# Altium PCB eq.PcbDoc
Units mil, origin at the board's own origin, x right, y up, seen from the top; angles counter-clockwise.
Board outline 7000 x 16300 mil, 2 copper layers (Top Layer, Bottom Layer); 218 components, 155 nets, 606 pads, 0 vias.
Unrouted connection lines stored in the file: 387.
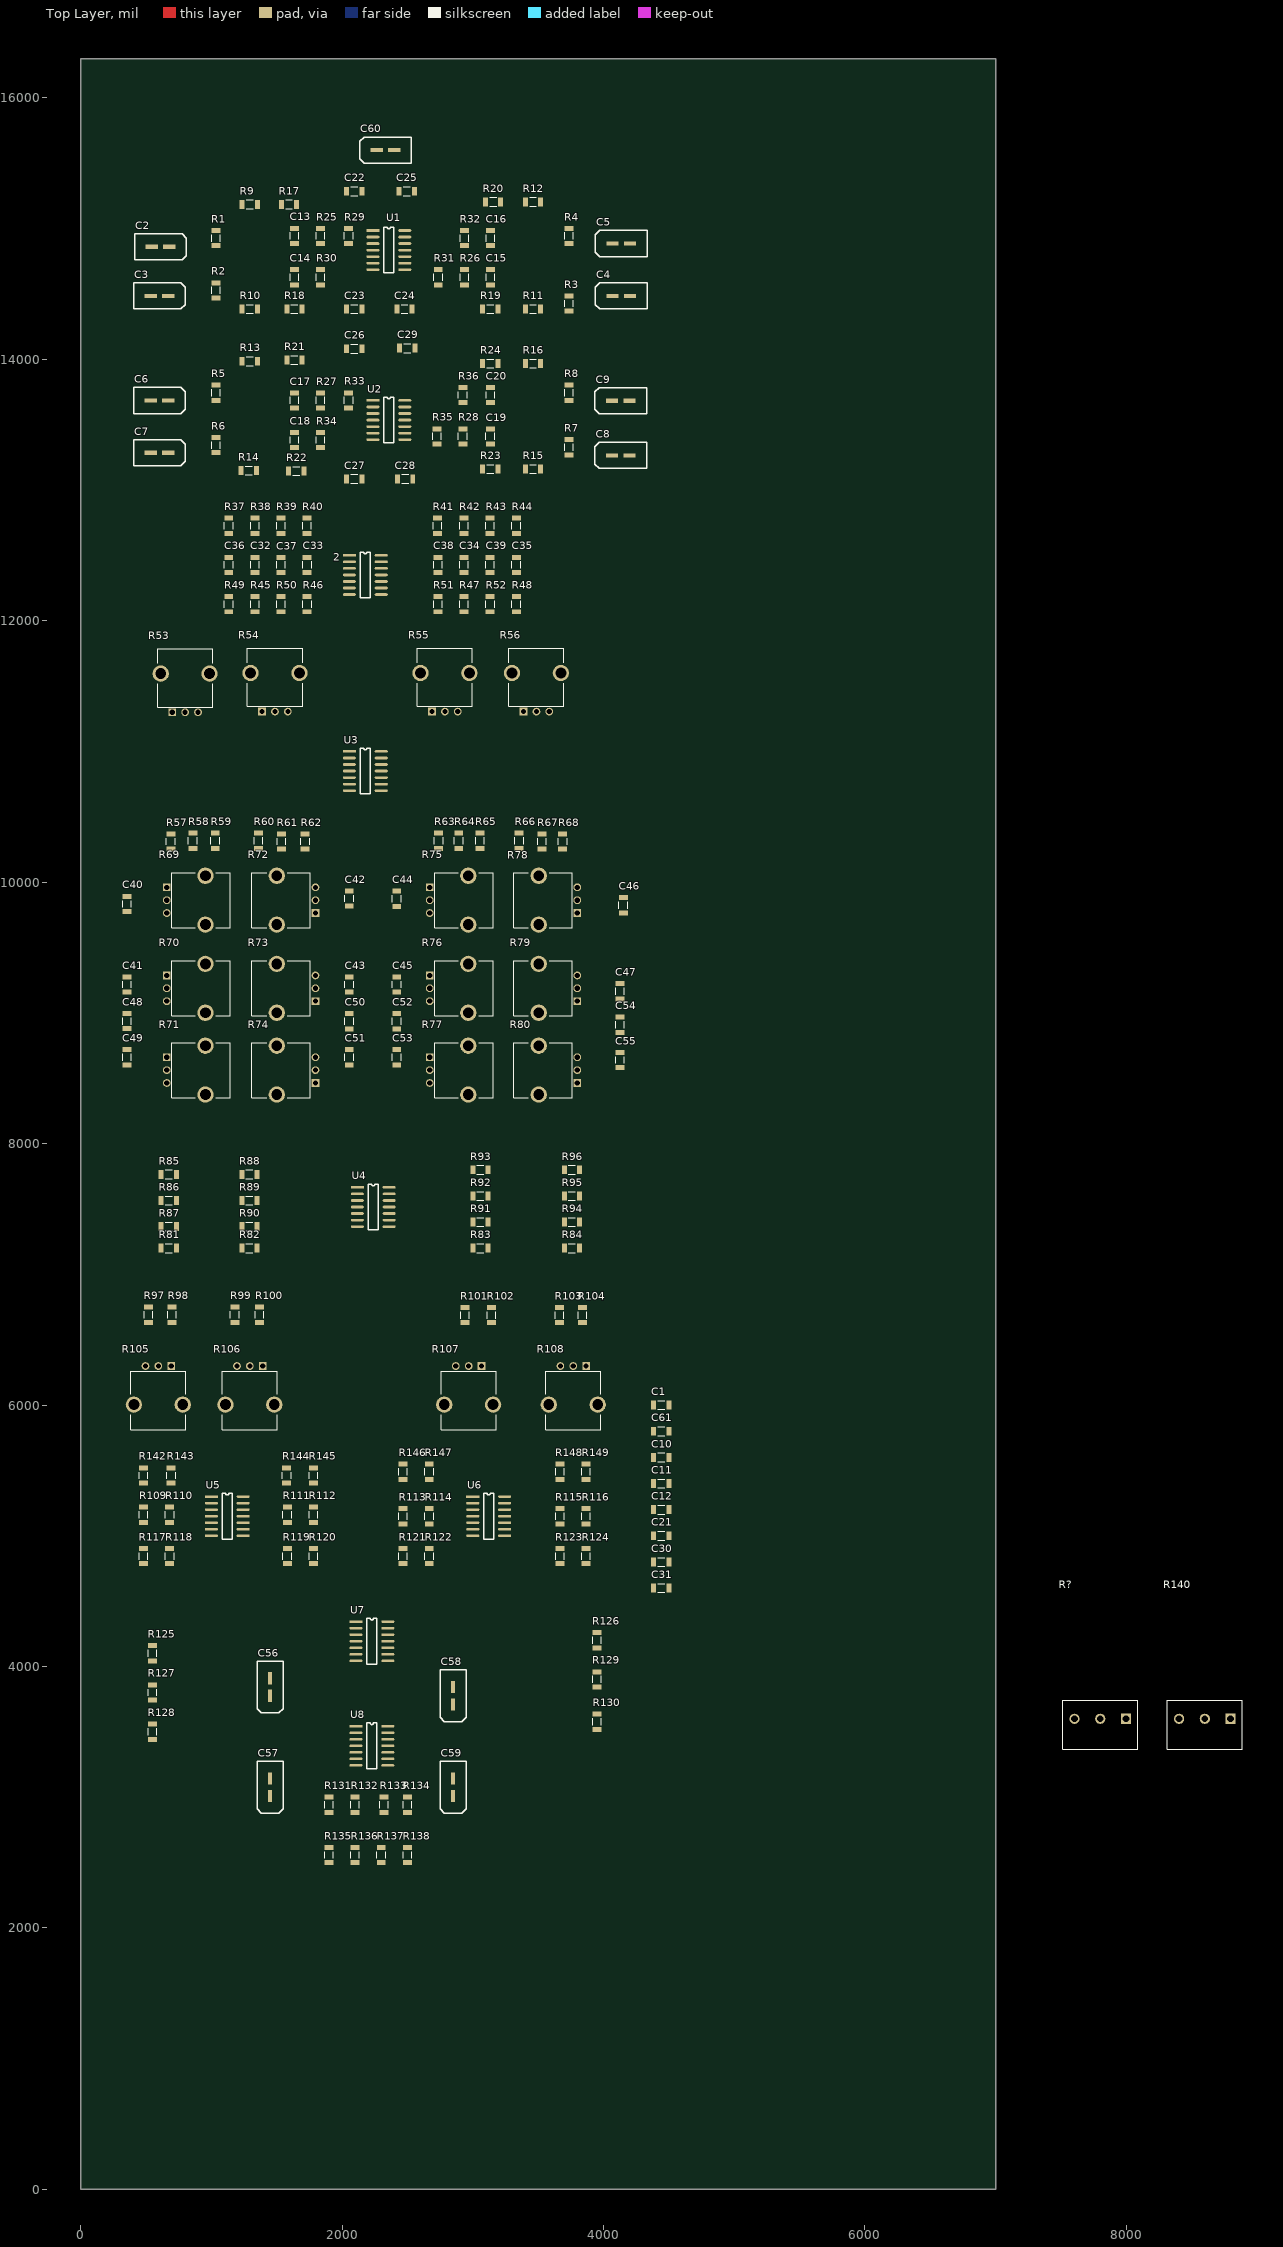
[diagram p0: Top Layer view]
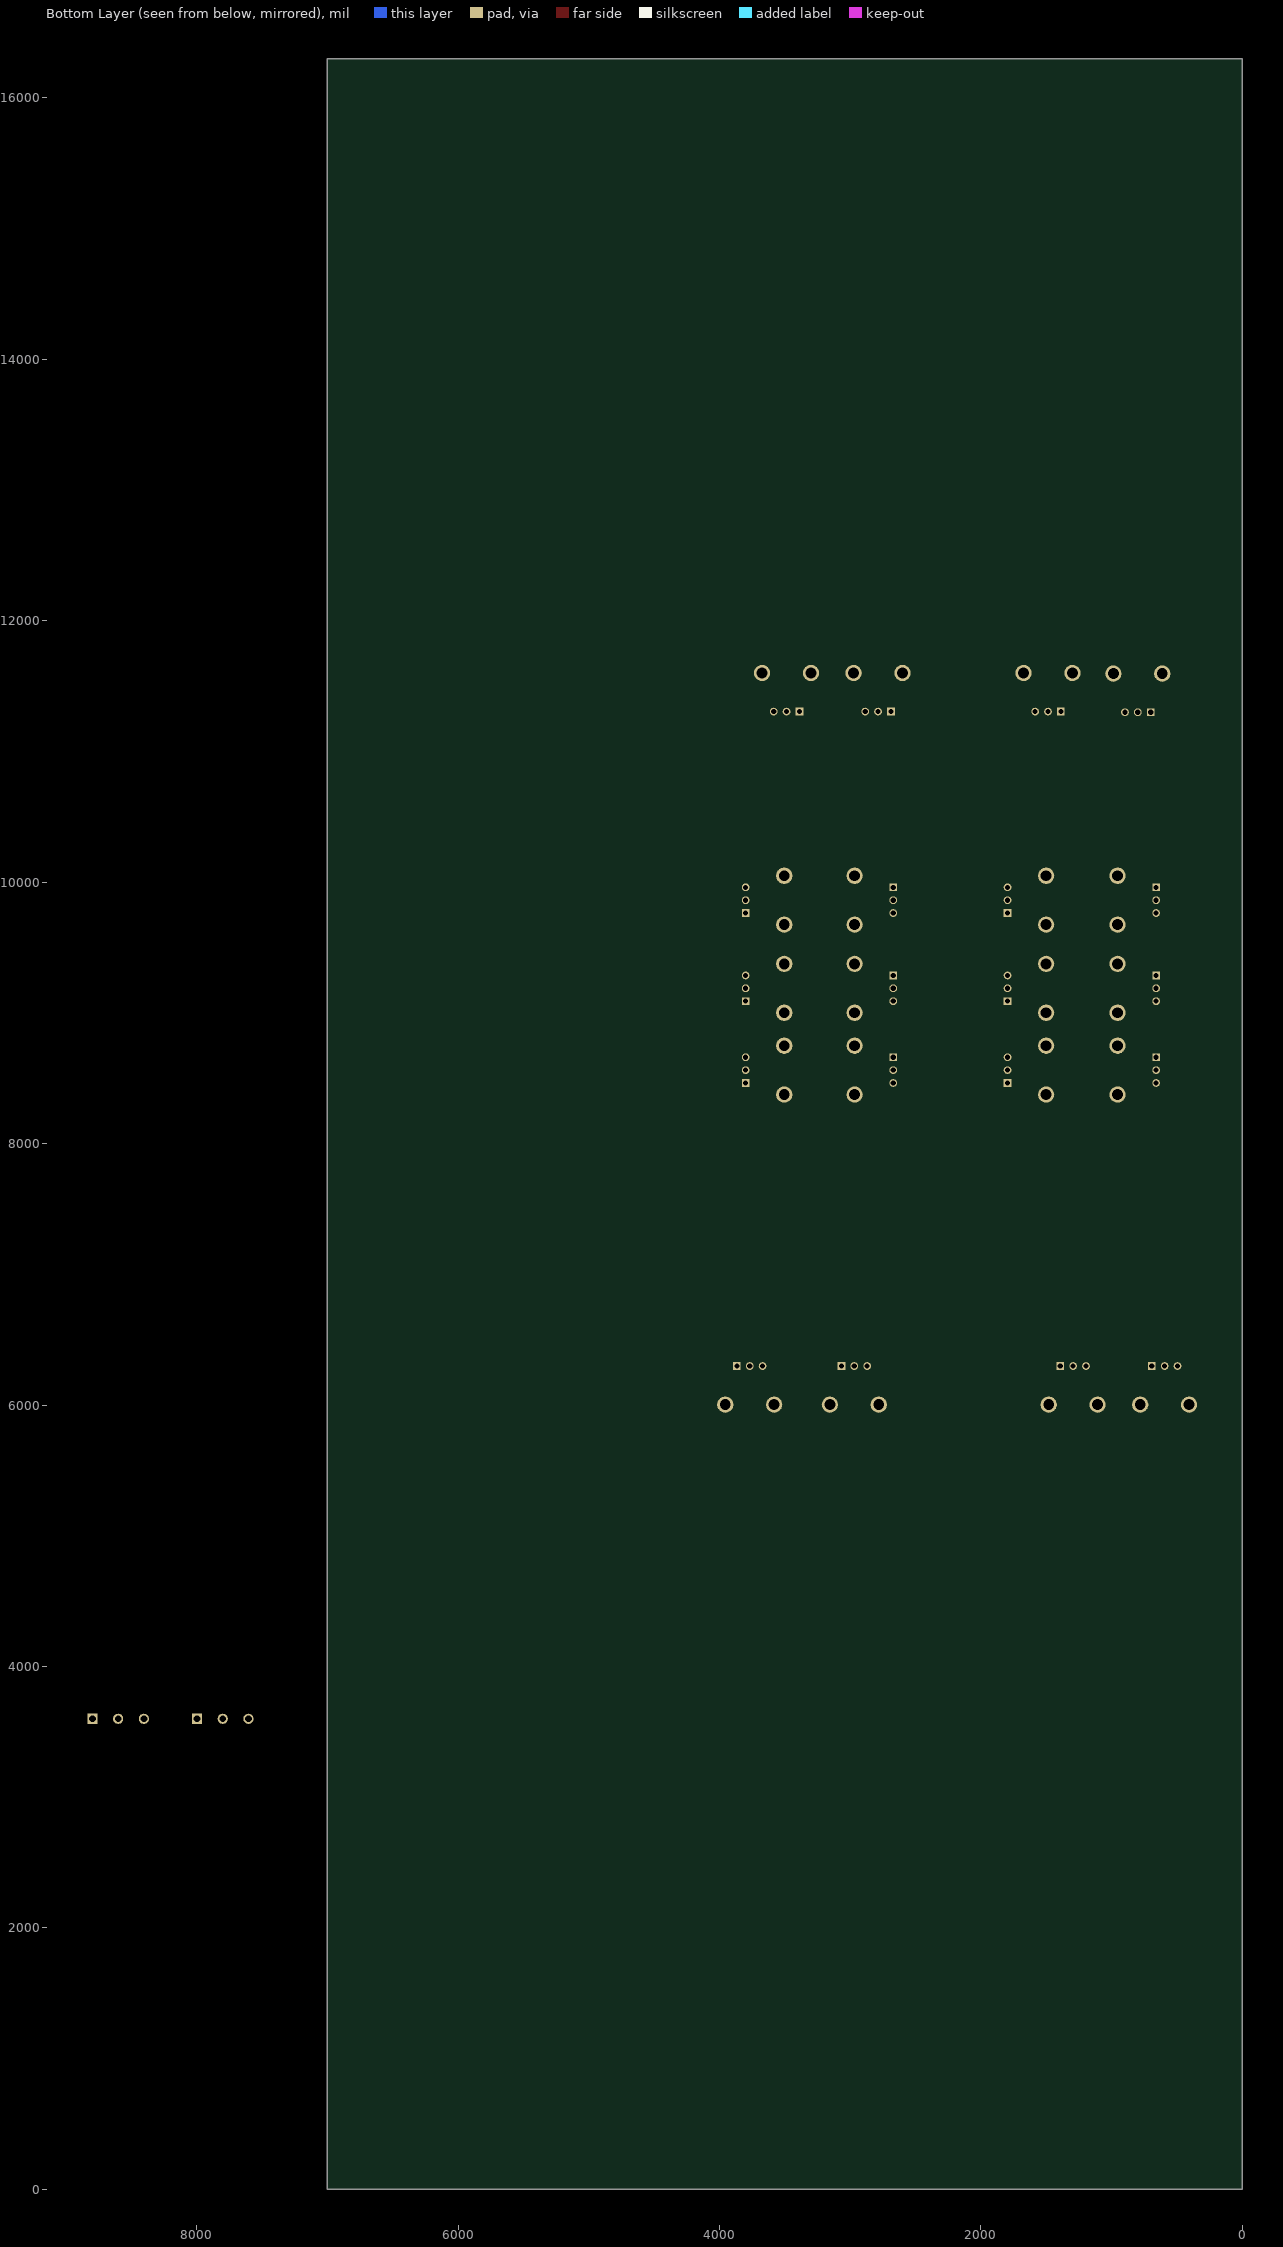
[diagram p1: Bottom Layer view, seen from below]

## Layer stack, top to bottom
Top Solder: solder mask 0.4, Solder Resist, Dk 3.5
Top Layer: signal copper 1.4
Dielectric 1: dielectric 12.6, FR-4, Dk 4.8
Bottom Layer: signal copper 1.4
Bottom Solder: solder mask 0.4, Solder Resist, Dk 3.5

## Board outline
0,0 7000,0 7000,16300 0,16300

## Design rules (kind name [scope] priority, off if disabled: settings)
Clearance [All] p1: gap=10 ignorepadtopadclearanceinfootprint=TRUE except(0: Arc-Hole Track-Hole SMDPad-Hole THPad-Hole Via-Hole Fill-Hole Poly-Hole Region-Hole Text-Hole)
PolygonConnect [All] p1: connectstyle=Relief reliefconductorwidth=10 reliefentries=4 polygonreliefangle="90 Angle" airgapwidth=10
RoomDefinition U_Sheet4 [InComponentClass('U_Sheet4')] p1: confinementstyle=ConfineIn formatcopy=TRUE lockcomponents=FALSE outline 7045,4760 9085,4760 9085,5280 7045,5280
RoomDefinition U_schema3 [InComponentClass('U_schema3')] p2: confinementstyle=ConfineIn formatcopy=TRUE lockcomponents=FALSE outline 7095,3293.27 14975,3293.27 14975,4653.27 7095,4653.27
RoutingVias [All] p1: holewidth=28 width=50 viastyle="Through Hole" minholewidth=28 minwidth=50 maxholewidth=28 maxwidth=50
SolderMaskExpansion [All] p1: expansion=4 istentingtop=FALSE
Width [All] p1: maxlimit=50 minlimit=15 preferedwidth=25 minimp=50.000000 maximp=50.000000 favimp=50.000000
30 further rules are at their usual default settings.

## Classes and differential pairs
component class U_Sheet4: C1 C10 C11 C12 C21 C30 C31 C60 C61 P-25 X1
component class U_schema: 2 C2 C3 C4 C5 C6 C7 C8 C9 C13 C14 C15 C16 C17 C18 C19 C20 C22 C23 C24 C25 C26 C27 C28 C29 C32 C33 C34 C35 C36 C37 C38 C39 P-1 P-2 P-3 P-4 P-5 P-6 P-7 P-9 P-10 P-G P-I P-x R1 R2 R3 R4 R5 R6 R7 R8 R9 R10 R11 R12 R13 R14 R15 R16 R17 R18 R19 R20 R21 R22 R23 R24 R25 R26 R27 R28 R29 R30 R31 R32 R33 R34 R35 R36 R37 R38 R39 R40 R41 R42 R43 R44 R45 R46 R47 R48 R49 R50 R51 R52 R53 R54 R55 R56 U1 U2 U3
component class U_schema3: C56 C57 C58 C59 P-20 P-21 P-22 P-23 P-24 P-? R125 R126 R127 R128 R129 R130 R131 R132 R133 R134 R135 R136 R137 R138 R140 R? U7 U8
component class U_schema2: P-17 P-18 P-A P-B P-C P-D P-E P-F R97 R98 R99 R100 R101 R102 R103 R104 R105 R106 R107 R108 R109 R110 R111 R112 R113 R114 R115 R116 R117 R118 R119 R120 R121 R122 R123 R124 R142 R143 R144 R145 R146 R147 R148 R149 U5 U6
component class U_schema1: C40 C41 C42 C43 C44 C45 C46 C47 C48 C49 C50 C51 C52 C53 C54 C55 P-13 P-14 P-15 P-16 R57 R58 R59 R60 R61 R62 R63 R64 R65 R66 R67 R68 R69 R70 R71 R72 R73 R74 R75 R76 R77 R78 R79 R80 R81 R82 R83 R84 R85 R86 R87 R88 R89 R90 R91 R92 R93 R94 R95 R96 U4

## Components (designator, comment, footprint, x,y, rotation, side; value= is the part's Value field where it differs from the comment)
2 "OPA1664AIDR" OPA1664AIDR 2056,12500 r0 top
C1 "Cap" SMD_CAPACITOR 4441.73,6000 r180 top value=100nF
C2 "Cap Pol1" SMD_POLAR_CAPACITOR 611.27,14860 r0 top value=10µF
C3 "Cap Pol1" SMD_POLAR_CAPACITOR 603,14485 r0 top value=10µF
C4 "Cap Pol1" SMD_POLAR_CAPACITOR 4136,14485 r180 top value=10µF
C5 "Cap Pol1" SMD_POLAR_CAPACITOR 4136,14885 r180 top value=10µF
C6 "Cap Pol1" SMD_POLAR_CAPACITOR 603,13685 r0 top value=10µF
C7 "Cap Pol1" SMD_POLAR_CAPACITOR 603,13285 r0 top value=10µF
C8 "Cap Pol1" SMD_POLAR_CAPACITOR 4132.01,13264.34 r180 top value=10µF
C9 "Cap Pol1" SMD_POLAR_CAPACITOR 4131.99,13682.95 r180 top value=10µF
C10 "Cap" SMD_CAPACITOR 4441.73,5600 r180 top value=100nF
C11 "Cap" SMD_CAPACITOR 4441.73,5400 r180 top value=100nF
C12 "Cap" SMD_CAPACITOR 4441.73,5200 r180 top value=100nF
C13 "Cap" SMD_CAPACITOR 1636,14943.27 r90 top value=1.5nF
C14 "Cap" SMD_CAPACITOR 1636,14626.73 r270 top value=1.5nF
C15 "Cap" SMD_CAPACITOR 3136,14626.73 r270 top value=1.5nF
C16 "Cap" SMD_CAPACITOR 3136,14926.73 r90 top value=1.5nF
C17 "Cap" SMD_CAPACITOR 1636,13685 r90 top value=1.5nF
C18 "Cap" SMD_CAPACITOR 1636,13381.91 r270 top value=1.5nF
C19 "Cap" SMD_CAPACITOR 3134.43,13409.82 r270 top value=1.5nF
C20 "Cap" SMD_CAPACITOR 3136,13726.73 r90 top value=1.5nF
C21 "Cap" SMD_CAPACITOR 4441.73,5000 r180 top value=100nF
C22 "Cap" SMD_CAPACITOR 2094.27,15285 r0 top value=100nF
C23 "Cap" SMD_CAPACITOR 2094.27,14385 r0 top value=100nF
C24 "Cap" SMD_CAPACITOR 2477.73,14385 r180 top value=100nF
C25 "Cap" SMD_CAPACITOR 2494.27,15285 r180 top value=100nF
C26 "Cap" SMD_CAPACITOR 2094.27,14080.62 r0 top value=100nF
C27 "Cap" SMD_CAPACITOR 2094.27,13085 r0 top value=100nF
C28 "Cap" SMD_CAPACITOR 2482.73,13085 r180 top value=100nF
C29 "Cap" SMD_CAPACITOR 2499.27,14085 r0 top value=100nF
C30 "Cap" SMD_CAPACITOR 4441.73,4800 r180 top value=100nF
C31 "Cap" SMD_CAPACITOR 4441.73,4600 r180 top value=100nF
C32 "Cap" SMD_CAPACITOR 1333.31,12426.73 r90 top value=22pF
C33 "Cap" SMD_CAPACITOR 1733.31,12426.73 r90 top value=22pF
C34 "Cap" SMD_CAPACITOR 2933.31,12426.73 r90 top value=22pF
C35 "Cap" SMD_CAPACITOR 3333.31,12426.73 r270 top value=22pF
C36 "Cap" SMD_CAPACITOR 1133.31,12426.73 r270 top value=22pF
C37 "Cap" SMD_CAPACITOR 1533.31,12426.73 r270 top value=22pF
C38 "Cap" SMD_CAPACITOR 2733.31,12426.73 r270 top value=22pF
C39 "Cap" SMD_CAPACITOR 3132.7,12426.73 r270 top value=22pF
C40 "Cap" SMD_CAPACITOR 355,9833.27 r270 top value=47nF
C41 "Cap" SMD_CAPACITOR 355,9216.73 r270 top value=4nF7
C42 "Cap" SMD_CAPACITOR 2055,9875 r90 top value=47nF
C43 "Cap" SMD_CAPACITOR 2055,9216.73 r90 top value=4nF7
C44 "Cap" SMD_CAPACITOR 2418.53,9872.47 r270 top value=47nF
C45 "Cap" SMD_CAPACITOR 2418.53,9216.73 r270 top value=4nF7
C46 "Cap" SMD_CAPACITOR 4151.73,9823.27 r90 top value=47nF
C47 "Cap" SMD_CAPACITOR 4126.73,9165 r90 top value=4nF7
C48 "Cap" SMD_CAPACITOR 355,8937.05 r270 top value=4nF7
C49 "Cap" SMD_CAPACITOR 355,8660.43 r270 top value=4nF7
C50 "Cap" SMD_CAPACITOR 2055,8936.16 r270 top value=4nF7
C51 "Cap" SMD_CAPACITOR 2055,8660.43 r90 top value=4nF7
C52 "Cap" SMD_CAPACITOR 2418.53,8936.16 r270 top value=4nF7
C53 "Cap" SMD_CAPACITOR 2418.53,8660.43 r90 top value=4nF7
C54 "Cap" SMD_CAPACITOR 4126.73,8909.58 r270 top value=4nF7
C55 "Cap" SMD_CAPACITOR 4126.73,8639.8 r90 top value=4nF7
C56 "Cap Pol1" SMD_POLAR_CAPACITOR 1450,3843.27 r270 top value=10µF
C57 "Cap Pol1" SMD_POLAR_CAPACITOR 1450,3076.27 r270 top value=10µF
C58 "Cap Pol1" SMD_POLAR_CAPACITOR 2850,3776.27 r270 top value=10µF
C59 "Cap Pol1" SMD_POLAR_CAPACITOR 2850,3076.27 r270 top value=10µF
C60 "Cap Pol1" SMD_POLAR_CAPACITOR 2333,15600 r180 top value=100pF
C61 "Cap" SMD_CAPACITOR 4441.73,5800 r180 top value=100nF
R1 "Res2" SMD_RESISTOR 1036,14926.73 r90 top value=1K5
R2 "Res2" SMD_RESISTOR 1036,14526.73 r270 top value=1K5
R3 "Res2" SMD_RESISTOR 3736,14426.73 r270 top value=1K5
R4 "Res2" SMD_RESISTOR 3736,14943.27 r90 top value=1K5
R5 "Res2" SMD_RESISTOR 1036,13743.27 r270 top value=1K5
R6 "Res2" SMD_RESISTOR 1036,13343.27 r270 top value=1K5
R7 "Res2" SMD_RESISTOR 3736,13326.73 r270 top value=1K5
R8 "Res2" SMD_RESISTOR 3736,13743.27 r90 top value=1K5
R9 "Res2" SMD_RESISTOR 1294.27,15185 r0 top value=430R
R10 "Res2" SMD_RESISTOR 1294.27,14385 r0 top value=430R
R11 "Res2" SMD_RESISTOR 3460.46,14385 r180 top value=430R
R12 "Res2" SMD_RESISTOR 3460.46,15203.88 r180 top value=430R
R13 "Res2" SMD_RESISTOR 1294.27,13985 r0 top value=430R
R14 "Res2" SMD_RESISTOR 1285.7,13149.22 r0 top value=430R
R15 "Res2" SMD_RESISTOR 3460.46,13159.7 r180 top value=430R
R16 "Res2" SMD_RESISTOR 3460.46,13967.84 r180 top value=430R
R17 "Res2" SMD_RESISTOR 1594.27,15185 r0 top value=430R
R18 "Res2" SMD_RESISTOR 1636,14385 r0 top value=430R
R19 "Res2" SMD_RESISTOR 3134.43,14385 r180 top value=430R
R20 "Res2" SMD_RESISTOR 3155.56,15203.88 r180 top value=430R
R21 "Res2" SMD_RESISTOR 1636,13993.63 r0 top value=430R
R22 "Res2" SMD_RESISTOR 1649.91,13145.73 r0 top value=430R
R23 "Res2" SMD_RESISTOR 3134.43,13159.7 r180 top value=430R
R24 "Res2" SMD_RESISTOR 3134.43,13967.84 r180 top value=430R
R25 "Res2" SMD_RESISTOR 1836,14943.27 r270 top value=680R
R26 "Res2" SMD_RESISTOR 2936,14626.73 r270 top value=680R
R27 "Res2" SMD_RESISTOR 1836,13685 r270 top value=680R
R28 "Res2" SMD_RESISTOR 2924.36,13409.82 r90 top value=680R
R29 "Res2" SMD_RESISTOR 2050.96,14943.27 r90 top value=150R
R30 "Res2" SMD_RESISTOR 1836,14626.73 r90 top value=150R
R31 "Res2" SMD_RESISTOR 2736,14626.73 r270 top value=150R
R32 "Res2" SMD_RESISTOR 2936,14926.73 r90 top value=150R
R33 "Res2" SMD_RESISTOR 2050.96,13685 r90 top value=150R
R34 "Res2" SMD_RESISTOR 1836,13381.91 r270 top value=150R
R35 "Res2" SMD_RESISTOR 2725.96,13409.82 r270 top value=150R
R36 "Res2" SMD_RESISTOR 2924.36,13726.73 r90 top value=150R
R37 "Res2" SMD_RESISTOR 1133.31,12726.73 r270 top value=1K
R38 "Res2" SMD_RESISTOR 1333.31,12726.73 r270 top value=1K
R39 "Res2" SMD_RESISTOR 1533.31,12726.73 r270 top value=1K
R40 "Res2" SMD_RESISTOR 1731.37,12726.73 r270 top value=1K
R41 "Res2" SMD_RESISTOR 2729.88,12726.73 r270 top value=1K
R42 "Res2" SMD_RESISTOR 2932.51,12726.73 r270 top value=1K
R43 "Res2" SMD_RESISTOR 3132.7,12726.73 r270 top value=1K
R44 "Res2" SMD_RESISTOR 3333.31,12726.73 r270 top value=1K
R45 "Res2" SMD_RESISTOR 1333.31,12126.73 r270 top value=1K
R46 "Res2" SMD_RESISTOR 1733.31,12126.73 r90 top value=1K
R47 "Res2" SMD_RESISTOR 2933.31,12126.73 r270 top value=1K
R48 "Res2" SMD_RESISTOR 3333.31,12126.73 r270 top value=1K
R49 "Res2" SMD_RESISTOR 1133.31,12126.73 r90 top value=1K
R50 "Res2" SMD_RESISTOR 1533.31,12126.73 r270 top value=1K
R51 "Res2" SMD_RESISTOR 2733.31,12126.73 r90 top value=1K
R52 "Res2" SMD_RESISTOR 3133.31,12126.73 r90 top value=1K
R53 "*" RK09L1140A65 701.57,11300 r0 top value="10K Log"
R54 "*" RK09L1140A65 1388.58,11304.72 r0 top value="10K Log"
R55 "*" RK09L1140A65 2688.58,11304.72 r0 top value="10K Log"
R56 "*" RK09L1140A65 3388.58,11304.72 r0 top value="10K Log"
R57 "Res2" SMD_RESISTOR 690.38,10311.15 r270 top value=11K
R58 "Res2" SMD_RESISTOR 858.44,10316.73 r270 top value=3K6
R59 "Res2" SMD_RESISTOR 1029.88,10316.73 r270 top value=2K4
R60 "Res2" SMD_RESISTOR 1360.08,10316.73 r270 top value=11K
R61 "Res2" SMD_RESISTOR 1536.8,10311.15 r270 top value=3K6
R62 "Res2" SMD_RESISTOR 1718.18,10311.15 r270 top value=2K4
R63 "Res2" SMD_RESISTOR 2739.07,10316.73 r270 top value=11K
R64 "Res2" SMD_RESISTOR 2892.56,10316.73 r270 top value=3K6
R65 "Res2" SMD_RESISTOR 3055,10316.73 r270 top value=2K4
R66 "Res2" SMD_RESISTOR 3355,10316.73 r270 top value=11K
R67 "Res2" SMD_RESISTOR 3529.69,10311.15 r270 top value=3K6
R68 "Res2" SMD_RESISTOR 3687.81,10311.15 r270 top value=2K4
R69 "*" RK09L1140A65 659.72,9960.43 r270 top value=100K
R70 "*" RK09L1140A65 659.72,9286.42 r270 top value=100K
R71 "*" RK09L1140A65 659.72,8660.43 r270 top value=50K
R72 "*" RK09L1140A65 1796.45,9763.58 r90 top value=100K
R73 "*" RK09L1140A65 1796.45,9089.57 r90 top value=100K
R74 "*" RK09L1140A65 1796.45,8463.58 r90 top value=50K
R75 "*" RK09L1140A65 2670.73,9960.43 r270 top value=100K
R76 "*" RK09L1140A65 2670.73,9286.42 r270 top value=100K
R77 "*" RK09L1140A65 2670.73,8660.43 r270 top value=50K
R78 "*" RK09L1140A65 3799.87,9763.58 r90 top value=100K
R79 "*" RK09L1140A65 3799.87,9089.57 r90 top value=100K
R80 "*" RK09L1140A65 3799.87,8463.58 r90 top value=50K
R81 "Res2" SMD_RESISTOR 675,7200 r0 top value=11K
R82 "Res2" SMD_RESISTOR 1291.45,7200 r180 top value=11K
R83 "Res2" SMD_RESISTOR 3058.27,7200 r0 top value=11K
R84 "Res2" SMD_RESISTOR 3758.27,7200 r0 top value=11K
R85 "Res2" SMD_RESISTOR 675,7765 r0 top value=11K
R86 "Res2" SMD_RESISTOR 675,7565 r0 top value=3K6
R87 "Res2" SMD_RESISTOR 675,7365 r0 top value=2K4
R88 "Res2" SMD_RESISTOR 1291.45,7765 r0 top value=11K
R89 "Res2" SMD_RESISTOR 1291.45,7565 r0 top value=3K6
R90 "Res2" SMD_RESISTOR 1291.45,7365 r0 top value=2K4
R91 "Res2" SMD_RESISTOR 3058.27,7400 r0 top value=11K
R92 "Res2" SMD_RESISTOR 3058.27,7600 r0 top value=3K6
R93 "Res2" SMD_RESISTOR 3058.27,7800 r0 top value=2K4
R94 "Res2" SMD_RESISTOR 3758.27,7400 r0 top value=11K
R95 "Res2" SMD_RESISTOR 3758.27,7600 r0 top value=3K6
R96 "Res2" SMD_RESISTOR 3758.27,7800 r0 top value=2K4
R97 "Res2" SMD_RESISTOR 520,6690 r270 top value=10K
R98 "Res2" SMD_RESISTOR 700.04,6690 r270 top value=10K
R99 "Res2" SMD_RESISTOR 1179.81,6690 r270 top value=10K
R100 "Res2" SMD_RESISTOR 1369.37,6690 r270 top value=10K
R101 "Res2" SMD_RESISTOR 2940.55,6688.3 r270 top value=10K
R102 "Res2" SMD_RESISTOR 3142.74,6688.3 r270 top value=10K
R103 "Res2" SMD_RESISTOR 3663.62,6688.3 r270 top value=10K
R104 "Res2" SMD_RESISTOR 3839.37,6688.3 r270 top value=10K
R105 "*" RK09L1140A65 693.15,6298.54 r180 top value=10K
R106 "*" RK09L1140A65 1393.15,6298.54 r180 top value=10K
R107 "*" RK09L1140A65 3067.17,6298.54 r180 top value=10K
R108 "*" RK09L1140A65 3867.17,6298.54 r180 top value=10K
R109 "Res2" SMD_RESISTOR 481.73,5161.54 r90 top value=51K
R110 "Res2" SMD_RESISTOR 681.73,5161.54 r270 top value=51K
R111 "Res2" SMD_RESISTOR 1581.73,5161.54 r270 top value=51K
R112 "Res2" SMD_RESISTOR 1781.73,5161.54 r90 top value=51K
R113 "Res2" SMD_RESISTOR 2467.17,5149.5 r270 top value=51K
R114 "Res2" SMD_RESISTOR 2667.17,5149.5 r270 top value=51K
R115 "Res2" SMD_RESISTOR 3667.17,5149.5 r270 top value=51K
R116 "Res2" SMD_RESISTOR 3867.17,5149.5 r270 top value=51K
R117 "Res2" SMD_RESISTOR 481.73,4845 r270 top value=1K
R118 "Res2" SMD_RESISTOR 681.73,4845 r90 top value=1K
R119 "Res2" SMD_RESISTOR 1581.73,4845 r270 top value=1K
R120 "Res2" SMD_RESISTOR 1781.73,4845 r90 top value=1K
R121 "Res2" SMD_RESISTOR 2467.17,4845 r270 top value=1K
R122 "Res2" SMD_RESISTOR 2667.17,4845 r270 top value=1K
R123 "Res2" SMD_RESISTOR 3667.17,4845 r270 top value=1K
R124 "Res2" SMD_RESISTOR 3867.17,4845 r270 top value=1K
R125 "Res2" SMD_RESISTOR 550,4101.54 r90 top value=470K
R126 "Res2" SMD_RESISTOR 3950,4201.54 r270 top value=470K
R127 "Res2" SMD_RESISTOR 550,3801.54 r90 top value=10K
R128 "Res2" SMD_RESISTOR 550,3501.54 r270 top value=10K
R129 "Res2" SMD_RESISTOR 3950,3901.54 r270 top value=10K
R130 "Res2" SMD_RESISTOR 3951.11,3577.26 r270 top value=10K
R131 "Res2" SMD_RESISTOR 1900,2941.73 r90 top value=10K
R132 "Res2" SMD_RESISTOR 2100,2941.73 r90 top value=10K
R133 "Res2" SMD_RESISTOR 2321.7,2941.73 r90 top value=10K
R134 "Res2" SMD_RESISTOR 2500,2941.73 r90 top value=10K
R135 "Res2" SMD_RESISTOR 1900,2558.27 r270 top value=10K
R136 "Res2" SMD_RESISTOR 2100,2558.27 r270 top value=10K
R137 "Res2" SMD_RESISTOR 2300,2558.27 r270 top value=10K
R138 "Res2" SMD_RESISTOR 2500,2558.27 r270 top value=10K
R140 "*" PDB181K220K104B 8796.85,3600 r90 top value=5K
R142 "Res2" SMD_RESISTOR 481.73,5461.54 r270 top value=10K
R143 "Res2" SMD_RESISTOR 693.15,5461.54 r90 top value=10K
R144 "Res2" SMD_RESISTOR 1576.49,5461.54 r90 top value=10K
R145 "Res2" SMD_RESISTOR 1781.73,5461.54 r90 top value=10K
R146 "Res2" SMD_RESISTOR 2467.17,5490.67 r90 top value=10K
R147 "Res2" SMD_RESISTOR 2667.17,5490.67 r90 top value=10K
R148 "Res2" SMD_RESISTOR 3667.17,5490.67 r90 top value=10K
R149 "Res2" SMD_RESISTOR 3867.17,5490.67 r90 top value=10K
R? "*" PDB181K220K104B 7996.85,3600 r90 top value=5K
U1 "OPA1664AIDR" OPA1664AIDR 2236,14985 r0 top
U2 "OPA1664AIDR" OPA1664AIDR 2236,13685 r0 top
U3 "OPA1664AIDR" OPA1664AIDR 2056,11000 r0 top
U4 "OPA1664AIDR" OPA1664AIDR 2116.73,7665 r0 top
U5 "OPA1664AIDR" OPA1664AIDR 1000,5300 r0 top
U6 "OPA1664AIDR" OPA1664AIDR 3000,5300 r0 top
U7 "OPA1664AIDR" OPA1664AIDR 2106,4343.27 r0 top
U8 "OPA1664AIDR" OPA1664AIDR 2106,3543.27 r0 top

## Footprints (in the part's own frame and the unit in brackets; to place one, negate y for a bottom-side part, rotate by r counter-clockwise, add the part's x,y. Pads: shape width x height; smd on the part's side, far side on the other; paste and mask are expansions set on the pad)
OPA1664AIDR [mil]
  rect 100x20 smd: 1(0,0)
  oval 100x20 smd: 2(0,-50) 3(0,-100) 4(0,-150) 5(0,-200) 6(0,-250) 7(0,-300) 8(244,-300) 9(244,-250) 10(244,-200) 11(244,-150) 12(244,-100) 13(244,-50) 14(244,0)
  silkscreen extent 85,-325 159,25
PDB181K220K104B [mm]
  rect 1.98x1.98 hole 1.32: 1(0,0)
  round 1.98 hole 1.32: 2(0,5) 3(0,10)
  silkscreen extent -5.9,-2.3 3.6,12.3
RK09L1140A65 [mm]
  rect 1.5x1.5 hole 1: 1(0,0)
  round 1.5 hole 1: 2(2.5,0) 3(5,0)
  round 3.164 hole 2.11: MH1(-2.25,7.5) MH2(7.25,7.5)
  silkscreen extent -2.85,1 7.85,12.35, body extent -3.2,-0.4 8.2,12.35, height 35.1
SMD_CAPACITOR [mm]
  rect 0.97x1.73 smd: 1(-1.48,0) 2(1.48,0)
  silkscreen extent -0.67,-0.85 0.67,0.85
SMD_POLAR_CAPACITOR [mil]
  rect 94x32 smd: 1(-67,0) 2(67,0)
  silkscreen extent -198,-100 198,100
SMD_RESISTOR [mm]
  rect 0.97x1.73 smd: 1(-1.48,0) 2(1.48,0)
  silkscreen extent -0.67,-0.85 0.67,0.85

## Part data
2 U1 U2 U3 U4 U5 U6 U7 U8: library part CMP-0272-00211-3, "Sound Plus Low-Power, Low-Noise and Distortion, Audio Operational Amplifier, 3 to 36 V, -40 to 85 degC, 14-pin SOIC (D14), Green (RoHS & no Sb/Br)", Manufacturer="Texas Instruments", Rating=Catalog, Total Supply Voltage(Max)(+5V is 5, +/-5V is 10)=36, Total Supply Voltage(Min)(+5V is 5, +/-5V is 10)=3, CMRR(Min)(dB)=106, Code_JEDEC=MS-012, ComponentLink1Description="Manufacturer URL", ComponentLink1URL=http://www.ti.com/, ComponentLink2Description=Datasheet, ComponentLink2URL=http://www.ti.com/lit/ds/symlink/opa1664.pdf, ComponentLink3Description="Package Specification", ComponentLink3URL=http://www.ti.com/lit/ml/mpds177g/mpds177g.pdf, DatasheetVersion=SBOS489, Eco-Plan="Green (RoHS & no Sb/Br)", GBW(Typ)(MHz)=22, IIB(Max)(pA)=1200000, Iq per channel(Max)(mA)=1.5, Mounting Technology="Surface Mount", Number of Channels=4, Offset Drift(Typ)(uV/C)=2, PackageDescription="14-Pin Plastic Small Outline, Body 8.65 x 3.9 mm, Pitch 1.27 mm", PackageReference=D0014A, PackageVersion="4040047-5/M, 06/2011", Packing="LARGE T&R", PartNumber=OPA1664AIDR, Slew Rate(Typ)(V/us)=17, Sub Family="Audio Operational Amplifier, High Supply Voltage Amplifier (>=30V), Low Noise Amp (<=10nV/rtHz), Precision Amplifier", Vio (25C)(Max)(mV)=1.5
C1 C10 C11 C12 C13 C14 C15 C16 C17 C18 C19 C20 C21 C22 C23 C24 C25 C26 C27 C28 C29 C30 C31 C32 C33 C34 C35 C36 C37 C38 C39 C40 C41 C42 C43 C44 C45 C46 C47 C48 C49 C50 C51 C52 C53 C54 C55 C61: "Capacitor", LatestRevisionDate=17-Jul-2002, LatestRevisionNote="Re-released for DXP Platform.", PackageDescription="Radial Cap, Thru-Hole; 2 Leads; 0.3 in Pin Spacing", PackageReference=RAD-0.3, Published=8-Jun-2000, Publisher="Altium Limited"
C2 C3 C4 C5 C6 C7 C8 C9 C56 C57 C58 C59 C60: "Polarized Capacitor (Radial)", LatestRevisionDate=17-Jul-2002, LatestRevisionNote="Re-released for DXP Platform.", PackageDescription="Polarized Capacitor (Radial); 2 Leads", PackageReference=RB7.6-15, Published=8-Jun-2000, Publisher="Altium Limited"
R1 R2 R3 R4 R5 R6 R7 R8 R9 R10 R11 R12 R13 R14 R15 R16 R17 R18 R19 R20 R21 R22 R23 R24 R25 R26 R27 R28 R29 R30 R31 R32 R33 R34 R35 R36 R37 R38 R39 R40 R41 R42 R43 R44 R45 R46 R47 R48 R49 R50 R51 R52 R57 R58 R59 R60 R61 R62 R63 R64 R65 R66 R67 R68 R81 R82 R83 R84 R85 R86 R87 R88 R89 R90 R91 R92 R93 R94 R95 R96 R97 R98 R99 R100 R101 R102 R103 R104 R109 R110 R111 R112 R113 R114 R115 R116 R117 R118 R119 R120 R121 R122 R123 R124 R125 R126 R127 R128 R129 R130 R131 R132 R133 R134 R135 R136 R137 R138 R142 R143 R144 R145 R146 R147 R148 R149: "Resistor", LatestRevisionDate=17-Jul-2002, LatestRevisionNote="Re-released for DXP Platform.", PackageDescription="Axial Device, Thru-Hole; 2 Leads; 0.4 in Pin Spacing", PackageReference=AXIAL-0.4, Published=8-Jun-2000, Publisher="Altium Limited"
R53 R54 R55 R56: library part RK09L, DeviceSetName=RK09L, GateName_1=G$1, LibraryName=SD_Pots, SymbolName_1=POT_EU-
R69 R70 R71 R72 R73 R74 R75 R76 R77 R78 R79 R80 R105 R106 R107 R108: library part RK09L_1, DeviceSetName=RK09L, GateName_1=G$1, LibraryName=SD_Pots, SymbolName_1=POT_EU-
R140 R?: library part TRIM_EU-CA6V, "POTENTIOMETER", DeviceName=CA6V, DeviceSetName=TRIM_EU-, GateName_1=1, LibraryName=pot, SymbolName_1=TPOT

## Nets (pads, with @x,y where several pads share a name; then routed paths per layer and width w, separated by ;. In a path a pad name is that pad's centre, name@x,y a point inside that pad or via, vN(x,y) a via of type N, cw(c..) or ccw(c..) an arc to the next point about the centre after c; other vN are vias at no path point)
AGND: C13.1 C14.1 C15.1 C16.1 C17.1 C18.1 C19.1 C20.1 C32.1 C33.1 C34.1 C35.1 R1.1 R2.1 R3.1 R4.1 R5.1 R6.1 R7.1 R8.1 R45.1 R46.1 R47.1 R48.1 R53.1 R54.1 R55.1 R56.1 R105.2 R106.2 R107.2 R108.2 R125.1 R126.1 R131.1 R132.1 R133.1 R134.1 U4.3 U4.5 U4.10 U4.12 U5.3 U5.5 U5.10 U5.12 U6.3 U6.5 U6.10 U6.12 U7.3 U7.5 U8.5 U8.12
Net2_12: 2.12 C20.2 R24.2
Net2_13: 2.13 C29.1 R28.1 R36.1
Net2_14: 2.14 C29.2 R36.2 R44.1
NetC2_1: C2.1
NetC2_2: C2.2 R1.2 R9.1
NetC3_1: C3.1
NetC3_2: C3.2 R2.2 R10.1
NetC4_1: C4.1
NetC4_2: C4.2 R3.2 R11.1
NetC5_1: C5.1
NetC5_2: C5.2 R4.2 R12.1
NetC6_1: C6.1
NetC6_2: C6.2 R5.2 R13.1
NetC7_1: C7.1
NetC7_2: C7.2 R6.2 R14.1
NetC8_1: C8.1
NetC8_2: C8.2 R7.2 R15.1
NetC9_1: C9.1
NetC9_2: C9.2 R8.2 R16.1
NetC13_2: C13.2 R17.2 U1.3
NetC14_2: C14.2 R18.2 U1.5
NetC15_2: C15.2 R19.2 U1.10
NetC16_2: C16.2 R20.2 U1.12
NetC17_2: C17.2 R21.2 U2.3
NetC18_2: C18.2 R22.2 U2.5
NetC19_2: C19.2 R23.2 U2.10
NetC22_1: C22.1 R9.2 R17.1
NetC22_2: C22.2 R29.2 R37.1 U1.1
NetC23_1: C23.1 R25.1 R30.1 U1.6
NetC23_2: C23.2 R30.2 R38.1 U1.7
NetC24_1: C24.1 R11.2 R19.1
NetC24_2: C24.2 R31.2 R39.1 U1.8
NetC25_1: C25.1 R26.1 R32.1 U1.13
NetC25_2: C25.2 R32.2 R40.1 U1.14
NetC26_1: C26.1 R13.2 R21.1
NetC26_2: C26.2 R33.2 R41.1 U2.1
NetC27_1: C27.1 R27.1 R34.1 U2.6
NetC27_2: C27.2 R34.2 R42.1 U2.7
NetC28_1: C28.1 R15.2 R23.1
NetC28_2: C28.2 R35.2 R43.1 U2.8
NetC32_2: C32.2 R38.2 R45.2 U3.3
NetC33_2: C33.2 R40.2 R46.2 U3.5
NetC34_2: C34.2 R42.2 R47.2 U3.10
NetC35_2: C35.2 R44.2 R48.2 U3.12
NetC36_1: C36.1 R37.2 R49.1 U3.2
NetC36_2: C36.2 R49.2 R53.3 U3.1
NetC37_1: C37.1 R39.2 R50.1 U3.6
NetC37_2: C37.2 R50.2 R54.3 U3.7
NetC38_1: C38.1 R41.2 R51.1 U3.9
NetC38_2: C38.2 R51.2 R55.3 U3.8
NetC39_1: C39.1 R43.2 R52.1 U3.13
NetC39_2: C39.2 R52.2 R56.3 U3.14
NetC40_1: C40.1 R57.2 R69.1
NetC40_2: C40.2 R69.3 R85.1
NetC41_1: C41.1 R58.2 R70.1
NetC41_2: C41.2 R70.3 R86.1
NetC42_1: C42.1 R60.2 R72.1
NetC42_2: C42.2 R72.3 R88.1
NetC43_1: C43.1 R61.2 R73.1
NetC43_2: C43.2 R73.3 R89.1
NetC44_1: C44.1 R63.2 R75.1
NetC44_2: C44.2 R75.3 R91.1
NetC45_1: C45.1 R64.2 R76.1
NetC45_2: C45.2 R76.3 R92.1
NetC46_1: C46.1 R66.2 R78.1
NetC46_2: C46.2 R78.3 R94.1
NetC47_1: C47.1 R67.2 R79.1
NetC47_2: C47.2 R79.3 R95.1
NetC48_1: C48.1 R70.2
NetC48_2: C48.2 C49.2 R81.1 U4.2
NetC49_1: C49.1 R71.2
NetC50_1: C50.1 R73.2
NetC50_2: C50.2 C51.2 R82.1 U4.6
NetC51_1: C51.1 R74.2
NetC52_1: C52.1 R76.2
NetC52_2: C52.2 C53.2 R83.1 U4.9
NetC53_1: C53.1 R77.2
NetC54_1: C54.1 R79.2
NetC54_2: C54.2 C55.2 R84.1 U4.13
NetC55_1: C55.1 R80.2
NetC56_1: C56.1 R127.2 U8.1 U8.2
NetC56_2: C56.2 R131.2 R135.1
NetC57_1: C57.1 R128.2 U8.7
NetC57_2: C57.2 R132.2 R136.1
NetC58_1: C58.1 R129.2 U8.8 U8.9
NetC58_2: C58.2 R133.2 R137.1
NetC59_1: C59.1 R130.2 U8.14
NetC59_2: C59.2 R134.2 R138.1
NetR10_2: R10.2 R18.1
NetR12_2: R12.2 R20.1
NetR14_2: R14.2 R22.1
NetR16_2: R16.2 R24.1
NetR25_2: R25.2 R29.1 U1.2
NetR26_2: R26.2 R31.1 U1.9
NetR27_2: R27.2 R33.1 U2.2
NetR28_2: R28.2 R35.1 U2.9
NetR53_2: R53.2 R57.1 R58.1 R59.1
NetR54_2: R54.2 R60.1 R61.1 R62.1
NetR55_2: R55.2 R63.1 R64.1 R65.1
NetR56_2: R56.2 R66.1 R67.1 R68.1
NetR59_2: R59.2 R71.1
NetR62_2: R62.2 R74.1
NetR65_2: R65.2 R77.1
NetR68_2: R68.2 R80.1
NetR69_2: R69.2 R81.2
NetR71_3: R71.3 R87.1
NetR72_2: R72.2 R82.2
NetR74_3: R74.3 R90.1
NetR75_2: R75.2 R83.2
NetR77_3: R77.3 R93.1
NetR78_2: R78.2 R84.2
NetR80_3: R80.3 R96.1
NetR85_2: R85.2 R86.2 R87.2 R97.1 R98.1 U4.1
NetR88_2: R88.2 R89.2 R90.2 R99.1 R100.1 U4.7
NetR91_2: R91.2 R92.2 R93.2 R101.1 R102.1 U4.8
NetR94_2: R94.2 R95.2 R96.2 R103.1 R104.1 U4.14
NetR97_2: R97.2 R105.3 R142.1
NetR98_2: R98.2 R105.1 R143.1
NetR99_2: R99.2 R106.3 R144.1
NetR100_2: R100.2 R106.1 R145.1
NetR101_2: R101.2 R107.3 R146.1
NetR102_2: R102.2 R107.1 R147.1
NetR103_2: R103.2 R108.3 R148.1
NetR104_2: R104.2 R108.1 R149.1
NetR109_1: R109.1 R142.2 U5.2
NetR109_2: R109.2 R117.1 U5.1
NetR110_1: R110.1 R143.2 U5.6
NetR110_2: R110.2 R118.1 U5.7
NetR111_1: R111.1 R144.2 U5.9
NetR111_2: R111.2 R119.1 U5.8
NetR112_1: R112.1 R145.2 U5.13
NetR112_2: R112.2 R120.1 U5.14
NetR113_1: R113.1 R146.2 U6.2
NetR113_2: R113.2 R121.1 U6.1
NetR114_1: R114.1 R147.2 U6.6
NetR114_2: R114.2 R122.1 U6.7
NetR115_1: R115.1 R148.2 U6.9
NetR115_2: R115.2 R123.1 U6.8
NetR116_1: R116.1 R149.2 U6.13
NetR116_2: R116.2 R124.1 U6.14
NetR117_2: R117.2 R119.2 R121.2 R123.2
NetR118_2: R118.2 R120.2 R122.2 R124.2
NetR125_2: R125.2 U7.1 U8.3
NetR126_2: R126.2 U7.7 U8.10
NetR127_1: R127.1 R128.1 U8.6
NetR129_1: R129.1 R130.1 U8.13
NetR135_2: R135.2
NetR136_2: R136.2
NetR137_2: R137.2
NetR138_2: R138.2
NetR139_2: U7.2
NetR139_5: U7.6
opamp1gnd: 2.4 C1.1 C10.1 C11.1 C12.1 C21.1 C30.1 C31.1 C60.2 C61.1 U1.4 U2.4 U3.11 U4.11 U5.11 U6.11 U7.11 U8.11
opamp1vcc: 2.11 C1.2 C10.2 C11.2 C12.2 C21.2 C30.2 C31.2 C60.1 C61.2 U1.11 U2.11 U3.4 U4.4 U5.4 U6.4 U7.4 U8.4
pads on no net: 2.1 2.2 2.3 2.5 2.6 2.7 2.8 2.9 2.10 R53.MH1 R53.MH2 R54.MH1 R54.MH2 R55.MH1 R55.MH2 R56.MH1 R56.MH2 R69.MH1 R69.MH2 R70.MH1 R70.MH2 R71.MH1 R71.MH2 R72.MH1 R72.MH2 R73.MH1 R73.MH2 R74.MH1 R74.MH2 R75.MH1 R75.MH2 R76.MH1 R76.MH2 R77.MH1 R77.MH2 R78.MH1 R78.MH2 R79.MH1 R79.MH2 R80.MH1 R80.MH2 R105.MH1 R105.MH2 R106.MH1 R106.MH2 R107.MH1 R107.MH2 R108.MH1 R108.MH2 R140.1 R140.2 R140.3 R?.1 R?.2 R?.3 U2.12 U2.13 U2.14 U7.8 U7.9 U7.10 U7.12 U7.13 U7.14